# Altium PCB 04-12307_Drone_ESC.PcbDoc (part 3 of 5)
Units mm, origin at the board's own origin, x right, y up, seen from the top; angles counter-clockwise.
Board outline 55 x 33 mm, 4 copper layers (LAYER 1 (Top), LAYER 2, LAYER 3, LAYER 4 (Bottom)), stack 1.504 mm thick; 174 components, 90 nets, 407 pads, 193 vias.
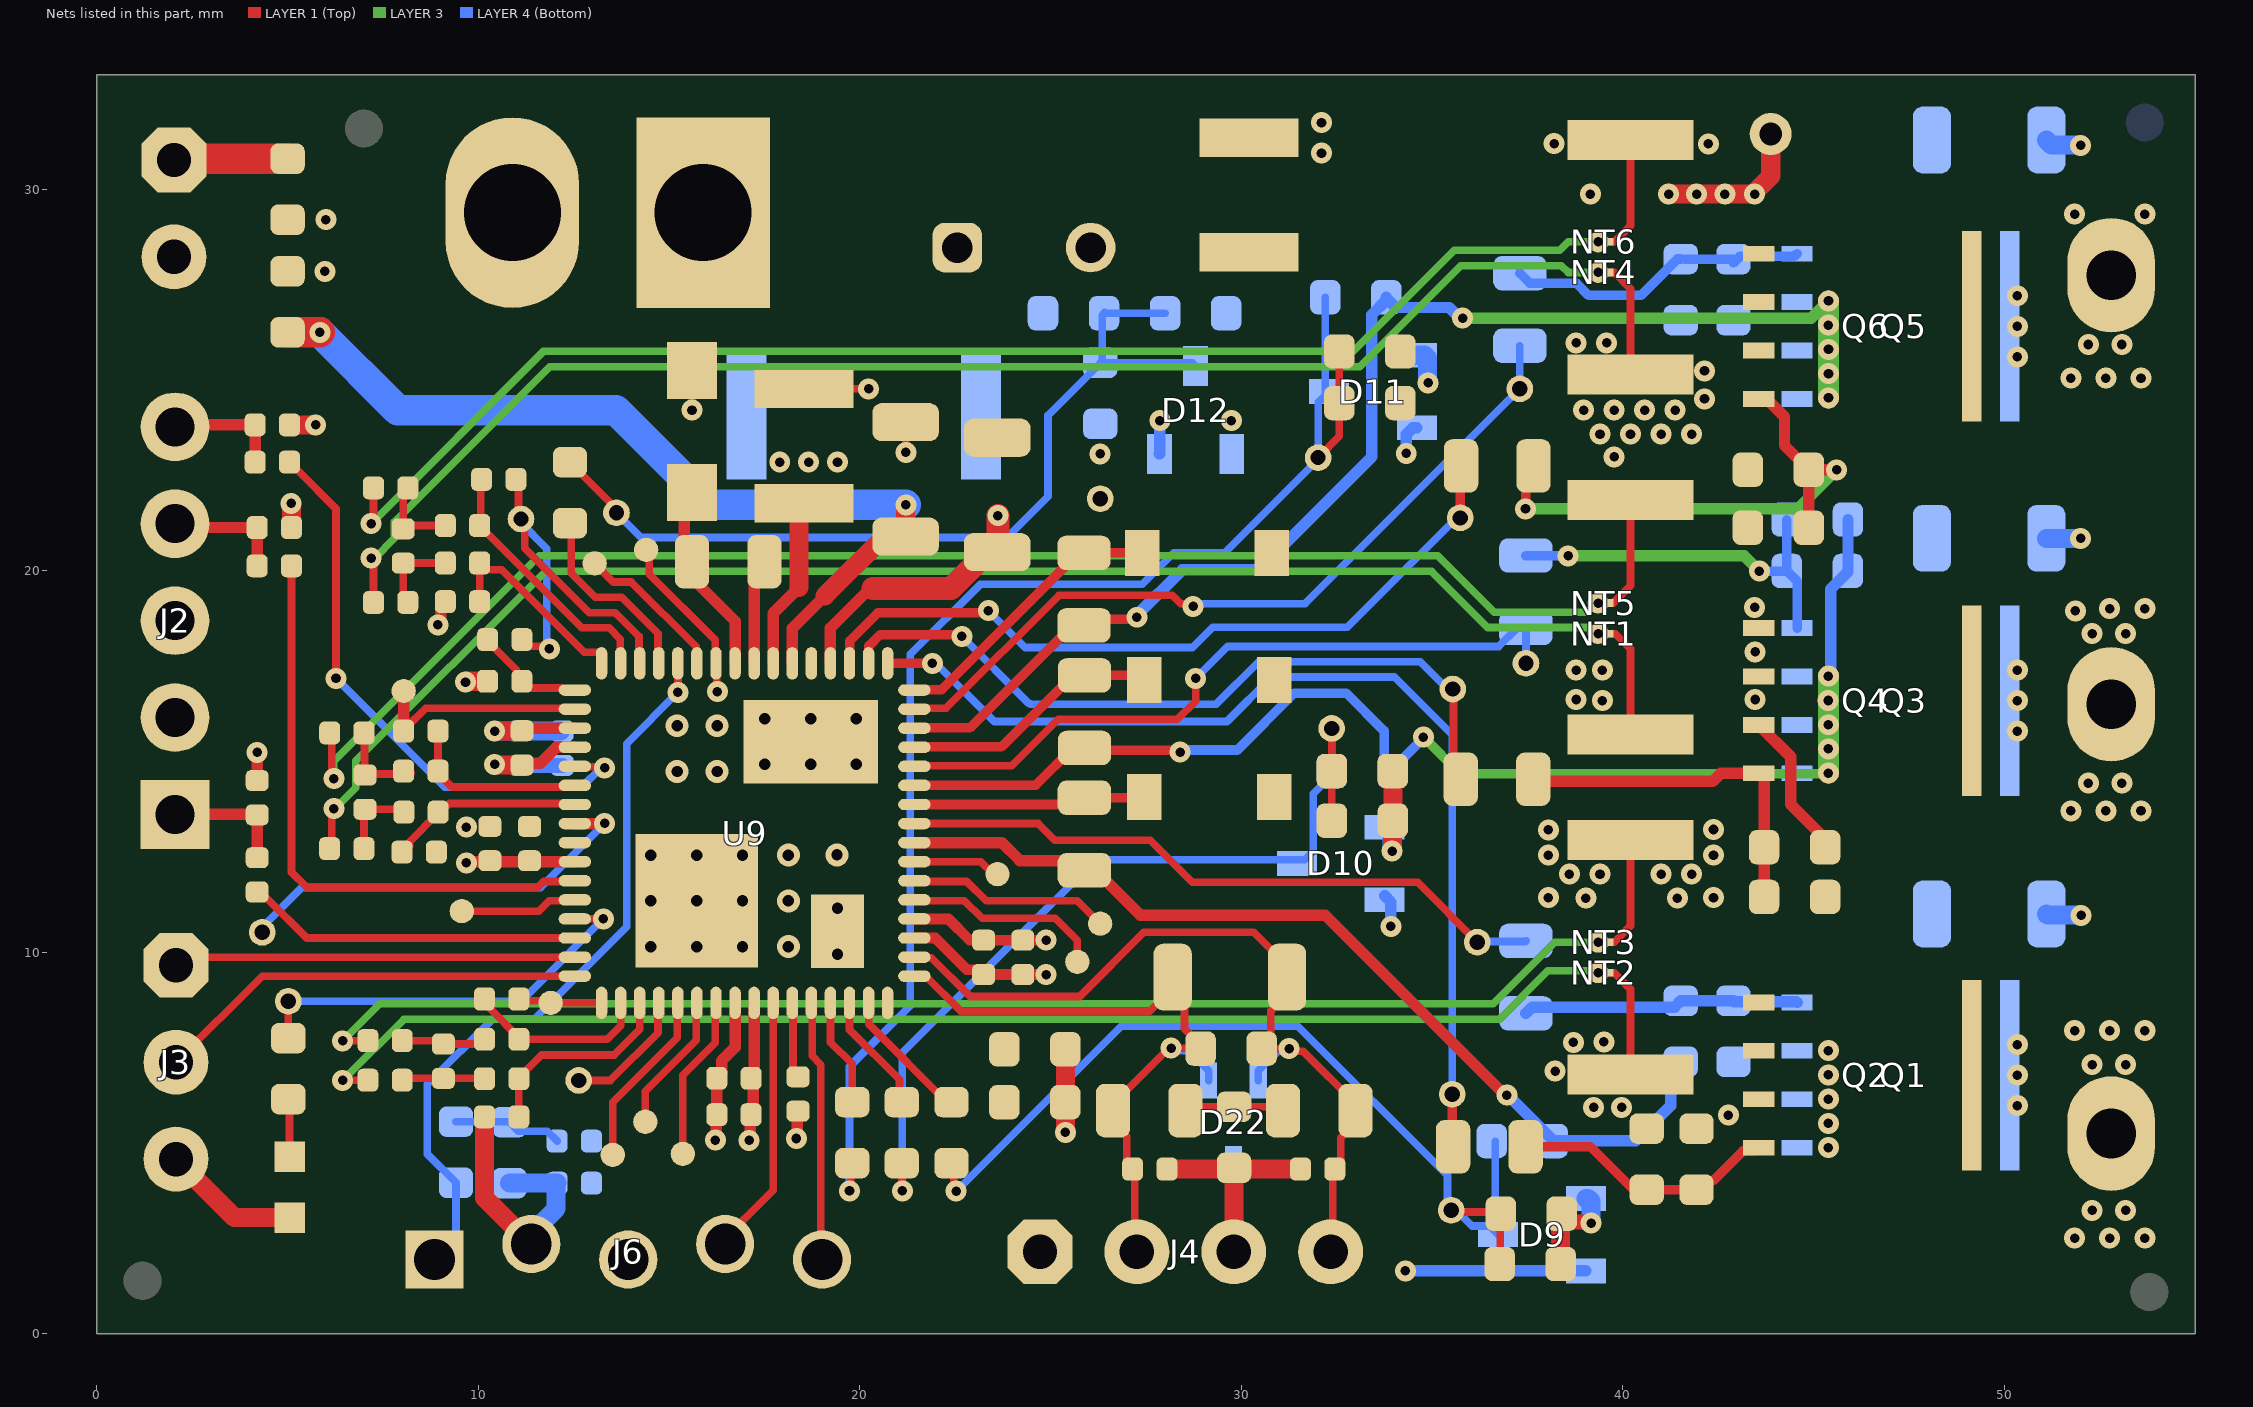
[diagram p4: the nets of this part, all layers, seen from the top]

## Part data (continued)
D24: library part DIODE1801, Forward Current=2A, Manufacturer 1="Nexperia USA Inc.", Manufacturer Part Number 1=PMEG6020ELRX, Operating Temperature="-55C to +175C", Package=SOD-123W, Reverse Current=150uA, Reverse Voltage=60V, Supplier Part Number 1=1727-2298-1-ND, Category=Diode, ComponentLink1Description="SVN Datasheet", ComponentLink1URL=https://chn-vm-apps.microchip.com/mchprepo/parts/Datasheets/PMEG6020ELR.pdf, ComponentLink2Description="Local Datasheet", ComponentLink2URL=C:\ALTIUM_WORK\00001_MCHP-CDB\Datasheets\PMEG6020ELR.pdf, ComponentLink3Description="Open Symbol", ComponentLink3URL="C:\ALTIUM_WORK\00001_MCHP-CDB\Library\LibraryRefs\Diode Schottky.SchLib", ComponentLink4Description="Open Footprint", ComponentLink4URL=C:\ALTIUM_WORK\00001_MCHP-CDB\Library\Footprints\SOD-123W.PcbLib, ComponentLink5Description="Open Footprint 2", ComponentLink6Description="Open Footprint 3", ComponentLink7Description="Open Footprint 4", Description_="DIO SCTKY PMEG6020ELRX 760mV 2A 60V SMD SOD-123W", Dev Tools Status=Design, MCHP-ID=DIODE1801, Owner="Narasimha Murthy", Populated=YES, Quantity Override=1, Reverse Recovery Time=<500ns, Revision=1, Status="MCL Design", Supplier 1=Digi-Key, Symbol="Diode Schottky", Type="Rectifier Single"
FD1 FD2 FD3 FD4 FD5 FD6: library part MECH0282, "Fiducial", Category=Hardware, ComponentLink1Description="SVN Datasheet", ComponentLink2Description="Local Datasheet", ComponentLink3Description="Open Symbol", ComponentLink3URL="C:\ALTIUM_WORK\00001_MCHP-CDB\Library\LibraryRefs\FIDUCIAL ROUND.SchLib", ComponentLink4Description="Open Footprint", ComponentLink4URL=C:\ALTIUM_WORK\00001_MCHP-CDB\Library\Footprints\Fiducial_1mm.PcbLib, ComponentLink5Description="Open Footprint 2", ComponentLink6Description="Open Footprint 3", ComponentLink7Description="Open Footprint 4", Description_="FIDUCIAL ROUND PCB 1mm SMD", Dev Tools Status=Production, MCHP-ID=MECH0282, Owner="Dragos Danaila", Populated=MECH, Quantity Override=1, Revision=1, Status="MCL Design", Symbol="FIDUCIAL ROUND", Type=Fiducial
HVDD: library part CON2734, "Test Point", Category=Connector, ComponentLink1Description="SVN Datasheet", ComponentLink2Description="Local Datasheet", ComponentLink3Description="Open Symbol", ComponentLink3URL="C:\ALTIUM_WORK\00001_MCHP-CDB\Library\LibraryRefs\Test Point No BOM.SchLib", ComponentLink4Description="Open Footprint", ComponentLink4URL=C:\ALTIUM_WORK\00001_MCHP-CDB\Library\Footprints\TP_1.1x0.6.PcbLib, ComponentLink5Description="Open Footprint 2", ComponentLink6Description="Open Footprint 3", ComponentLink7Description="Open Footprint 4", Description_="CON TP PAD PCB TH D1.1H0.6", Dev Tools Status=Design, MCHP-ID=CON2734, Owner="Severino Balong Jr.", Populated=DNP, Quantity Override=1, Restricted Sourcing=No, Revision=1, Status="MCL Design", Symbol="Test Point No BOM", Type="Test Point No BOM"
J1: library part CON2207, Current=15A, Manufacturer 1=AMASS, Manufacturer Part Number 1=XT30U-M, Voltage=500V, Category=Connector, ComponentLink1Description="SVN Datasheet", ComponentLink1URL="https://chn-vm-apps.microchip.com/mchprepo/parts/Datasheets/XT30U SPEC.pdf", ComponentLink2Description="Local Datasheet", ComponentLink2URL="C:\ALTIUM_WORK\00001_MCHP-CDB\Datasheets\XT30U SPEC.pdf", ComponentLink3Description="Open Symbol", ComponentLink3URL="C:\ALTIUM_WORK\00001_MCHP-CDB\Library\LibraryRefs\CON 1x2 POLARIZED.SchLib", ComponentLink4Description="Open Footprint", ComponentLink4URL="C:\ALTIUM_WORK\00001_MCHP-CDB\Library\Footprints\CON TERMINAL XT30U-M 5mm 1x2 Male 30A TH V.PcbLib", ComponentLink5Description="Open Footprint 2", ComponentLink6Description="Open Footprint 3", ComponentLink7Description="Open Footprint 4", Description_="CON POWER XT30U-M 5mm 1x2 Male 15A TH V", Dev Tools Status=Design, MCHP-ID=CON2207, Owner="Octavian Stroe", Populated=Yes, Quantity Override=1, Revision=1, Status="MCL Design", Supplier 1=TME, Supplier Part Number 1=XT30U-M, Symbol="CON 1x2 POLARIZED", Type=Power
J2: library part CON3098, Manufacturer 1=Samtec, Manufacturer Part Number 1=TSW-105-26-S-S, Operating Temperature="–55C to +125C", Supplier Part Number 1=612-TSW-105-26-S-S-ND, Assembly Type=TH, Category=Connector, ComponentLink1Description="SVN Datasheet", ComponentLink1URL=https://chn-vm-apps.microchip.com/mchprepo/parts/Datasheets/tsw_th.pdf, ComponentLink2Description="Local Datasheet", ComponentLink2URL=C:\ALTIUM_WORK\00001_MCHP-CDB\Datasheets\tsw_th.pdf, ComponentLink3Description="Open Symbol", ComponentLink3URL="C:\ALTIUM_WORK\00001_MCHP-CDB\Library\LibraryRefs\Header 1x5.SchLib", ComponentLink4Description="Open Footprint", ComponentLink4URL=C:\ALTIUM_WORK\00001_MCHP-CDB\Library\Footprints\HDR_M_2.54_1x5_MH5.84_IH2.54_TH3.2_TH_VERT.PcbLib, ComponentLink5Description="Open Footprint 2", ComponentLink6Description="Open Footprint 3", ComponentLink7Description="Open Footprint 4", Description_="CON HDR-2.54 Male 1x5 Gold 5.84MH 2.54IH 3.2TH TH VERT", Dev Tools Status=Design, MCHP-ID=CON3098, Owner="Deepak Kariyappa", Populated=YES, Quantity Override=1, Restricted Sourcing=No, Revision=1, Status="MCL Design", Supplier 1=Digi-Key, Symbol="Header 1x5", Type="Header 2.54mm"
J3: library part CON2895, Current=6.3A, Manufacturer 1=Samtec, Manufacturer Part Number 1=TSW-103-08-G-S, Operating Temperature="-55C to +125C", Supplier Part Number 1=SAM1038-03-ND, Voltage=550VAC, Assembly Type=TH, Category=Connector, ComponentLink1Description="SVN Datasheet", ComponentLink1URL=https://chn-vm-apps.microchip.com/mchprepo/parts/Datasheets/tsw_th.pdf, ComponentLink2Description="Local Datasheet", ComponentLink2URL=C:\ALTIUM_WORK\00001_MCHP-CDB\Datasheets\tsw_th.pdf, ComponentLink3Description="Open Symbol", ComponentLink3URL="C:\ALTIUM_WORK\00001_MCHP-CDB\Library\LibraryRefs\Header 1x3.SchLib", ComponentLink4Description="Open Footprint", ComponentLink4URL=C:\ALTIUM_WORK\00001_MCHP-CDB\Library\Footprints\HDR_M_2.54_1x3_TH_V_SAM_TSW-103-08-G-S.PcbLib, ComponentLink5Description="Open Footprint 2", ComponentLink6Description="Open Footprint 3", ComponentLink7Description="Open Footprint 4", Description_="CON HDR-2.54 Male 1x3 Gold 5.84MH  TH VERT", Dev Tools Status=Production, MCHP-ID=CON2895, Owner="Dragos Danaila", Populated=YES, Quantity Override=1, Restricted Sourcing=No, Revision=3, Status="MCL Design", Supplier 1=Digi-Key, Symbol="Header 1x3", Type="Header 2.54mm"
J4: library part CON0148, Manufacturer 1=Samtec, Manufacturer 2="Würth Elektronik", Manufacturer 3="SHENZHEN JUNHAO ENGINEERING", Manufacturer Part Number 1=TSW-104-07-G-S, Manufacturer Part Number 2=61300411121, Manufacturer Part Number 3=211-0411-0021-401, Supplier Part Number 1=SAM1029-04-ND, Category=Connector, ComponentLink1Description="SVN Datasheet", ComponentLink1URL=https://chn-vm-apps.microchip.com/mchprepo/parts/Datasheets/TSW-XXX-XX-XXX-X-XX-XXX-MKT.pdf, ComponentLink2Description="Local Datasheet", ComponentLink2URL=C:\ALTIUM_WORK\00001_MCHP-CDB\Datasheets\TSW-XXX-XX-XXX-X-XX-XXX-MKT.pdf, ComponentLink3Description="Open Symbol", ComponentLink3URL="C:\ALTIUM_WORK\00001_MCHP-CDB\Library\LibraryRefs\Header 1x4.SchLib", ComponentLink4Description="Open Footprint", ComponentLink4URL=C:\ALTIUM_WORK\00001_MCHP-CDB\Library\Footprints\HDR_M_2.54_1x4.PcbLib, ComponentLink5Description="Open Footprint 2", ComponentLink6Description="Open Footprint 3", ComponentLink7Description="Open Footprint 4", Description_="CON HDR-2.54 Male 1x4 Gold 5.84MH TH VERT", Dev Tools Status=Production, MCHP-ID=CON0148, Populated=Yes, Quantity Override=1, Restricted Sourcing=No, Revision=4, Status="MCL Design", Supplier 1=Digi-Key, Supplier 2=Digi-Key, Supplier 3="SHENZHEN JUNHAO ENGINEERING", Supplier Part Number 2=732-5317-ND, Supplier Part Number 3=211-0411-0021-401, Symbol="Header 1x4", Type="Header 2.54mm"
J5: library part CON2887, Current=6.3A, Manufacturer 1="Samtec Inc.", Manufacturer Part Number 1=TSW-102-08-G-S, Operating Temperature="-55C to +155C", Supplier Part Number 1=SAM1038-02-ND, Voltage=550VAC, Assembly Type=TH, Category=Connector, ComponentLink1Description="SVN Datasheet", ComponentLink1URL=https://chn-vm-apps.microchip.com/mchprepo/parts/Datasheets/https://suddendocs.samtec.com/prints/tsw-xxx-xx-x-x-xx-xxx-footprint.pdf, ComponentLink2Description="Local Datasheet", ComponentLink2URL=C:\ALTIUM_WORK\00001_MCHP-CDB\Datasheets\https://suddendocs.samtec.com/prints/tsw-xxx-xx-x-x-xx-xxx-footprint.pdf, ComponentLink3Description="Open Symbol", ComponentLink3URL="C:\ALTIUM_WORK\00001_MCHP-CDB\Library\LibraryRefs\Header 1x2.SchLib", ComponentLink4Description="Open Footprint", ComponentLink4URL=C:\ALTIUM_WORK\00001_MCHP-CDB\Library\Footprints\HDR_M_2.54_1x2_TH_V_SAM_TSW-102-08-G-S.PcbLib, ComponentLink5Description="Open Footprint 2", ComponentLink6Description="Open Footprint 3", ComponentLink7Description="Open Footprint 4", Description_="CON HDR-2.54 Male 1x2 Gold 5.84MH TH VERT", Dev Tools Status=Design, MCHP-ID=CON2887, Owner="Dragos Danaila", Populated=YES, Quantity Override=1, Restricted Sourcing=No, Revision=1, Status="MCL Design", Supplier 1=Digi-Key, Symbol="Header 1x2", Type="Header 2.54mm"
J6: library part CON3170, Current=3A, Manufacturer 1="Sullins Connector Solutions", Manufacturer Part Number 1=PRPC005SGAN-M71RC, Operating Temperature="-40C to +105C", Supplier Part Number 1=S1311EC-05-ND, Assembly Type=TH, Category=Connector, ComponentLink1Description="SVN Datasheet", ComponentLink1URL="https://chn-vm-apps.microchip.com/mchprepo/parts/Datasheets/x RxCxxxSxxN-M71RC_ 11637-B.pdf", ComponentLink2Description="Local Datasheet", ComponentLink2URL="C:\ALTIUM_WORK\00001_MCHP-CDB\Datasheets\x RxCxxxSxxN-M71RC_ 11637-B.pdf", ComponentLink3Description="Open Symbol", ComponentLink3URL="C:\ALTIUM_WORK\00001_MCHP-CDB\Library\LibraryRefs\Header 1x5.SchLib", ComponentLink4Description="Open Footprint", ComponentLink4URL=C:\ALTIUM_WORK\00001_MCHP-CDB\Library\Footprints\HDR_M_2.54_1x5_STAGGERED.PcbLib, ComponentLink5Description="Open Footprint 2", ComponentLink6Description="Open Footprint 3", ComponentLink7Description="Open Footprint 4", Description_="CON HDR-2.54 Male 1x5 8.08MH TH R/A DNP", Dev Tools Status=Design, MCHP-ID=CON3170, Owner="Severino Balong Jr.", Populated=DNP, Quantity Override=1, Restricted Sourcing=No, Revision=1, Status="MCL Design", Supplier 1=Digi-Key, Symbol="Header 1x5", Type="Header 2.54mm"
LABEL1: Manufacturer 1="ACT Logimark AS", Manufacturer 2="Sunrise Paper (M) Sdn Bhd", Manufacturer 3=Raynen, Manufacturer Part Number 1=505462, Manufacturer Part Number 2=037268-5, Manufacturer Part Number 3=10010407, Category=MCHP-Manufacturing, ComponentLink1Description="SVN Datasheet", ComponentLink2Description="Local Datasheet", ComponentLink3Description="Open Symbol", ComponentLink3URL=C:\ALTIUM_WORK\00001_MCHP-CDB\Library\LibraryRefs\08-10015.SchLib, ComponentLink4Description="Open Footprint", ComponentLink4URL=C:\ALTIUM_WORK\00001_MCHP-CDB\Library\Footprints\08-10015.PcbLib, ComponentLink5Description="Open Footprint 2", ComponentLink6Description="Open Footprint 3", ComponentLink7Description="Open Footprint 4", Description_="LABEL PCBA 18x6mm Datamatrix Assy# / Rev / Serial / Date", Dev Tools Status=Production, MCHP-ID=08-10015, Owner="Mark Loper", Populated=MECH, Quantity Override=1, Revision=4, Status="MCL Design", Supplier 1="ACT Logimark AS", Supplier 2="Microchip Technology", Supplier 3=Raynen, Supplier Part Number 1=505462, Supplier Part Number 2=01000-004967, Supplier Part Number 3=10010407, Symbol=08-10015, Type="PCBA Label"
LD1: library part LED1102, "LED", Forward Current=20mA, Manufacturer 1="WURTH ELEKTRONIK", Manufacturer Part Number 1=150060YS75000, Operating Temperature="-40C to +85C", Power=72mW, Reverse Voltage=5V, Supplier Part Number 1=732-4981-1-ND, Category=Diode, ComponentLink1Description="SVN Datasheet", ComponentLink1URL=https://chn-vm-apps.microchip.com/mchprepo/parts/Datasheets/150060YS75000.pdf, ComponentLink2Description="Local Datasheet", ComponentLink2URL=C:\ALTIUM_WORK\00001_MCHP-CDB\Datasheets\150060YS75000.pdf, ComponentLink3Description="Open Symbol", ComponentLink3URL=C:\ALTIUM_WORK\00001_MCHP-CDB\Library\LibraryRefs\LED_yellow.SchLib, ComponentLink4Description="Open Footprint", ComponentLink4URL=C:\ALTIUM_WORK\00001_MCHP-CDB\Library\Footprints\LED_0603_Yellow.PcbLib, ComponentLink5Description="Open Footprint 2", ComponentLink6Description="Open Footprint 3", ComponentLink7Description="Open Footprint 4", Description_="DIO LED YELLOW 2V 20mA 120mcd Clear SMD 0603", Dev Tools Status=Design, MCHP-ID=LED1102, Owner="Narasimha Murthy", Populated=YES, Quantity Override=1, Revision=1, Status="MCL Design", Supplier 1=Digi-Key, Symbol=LED_yellow, Type="LED Single"
NT1 NT2 NT3 NT4 NT5 NT6: library part RES2817, Package=0.2mm, Category=Resistor, ComponentLink1Description="SVN Datasheet", ComponentLink2Description="Local Datasheet", ComponentLink3Description="Open Symbol", ComponentLink3URL="C:\ALTIUM_WORK\00001_MCHP-CDB\Library\LibraryRefs\Net Tie.SchLib", ComponentLink4Description="Open Footprint", ComponentLink4URL=C:\ALTIUM_WORK\00001_MCHP-CDB\Library\Footprints\NET_TIE_0.2mmx0.5mm.PcbLib, ComponentLink5Description="Open Footprint 2", ComponentLink6Description="Open Footprint 3", ComponentLink7Description="Open Footprint 4", Description_="RES Net Tie SMD Net Tie 0.2mm", Dev Tools Status=Design, MCHP-ID=RES2817, Owner="Cristina Salanti", Populated=DNP, Quantity Override=1, Restricted Sourcing=No, Revision=A, Status="MCL Design", Symbol="Net Tie", Type="RES SMD"
PAD1 PAD2 PAD3: library part MISC1024, Manufacturer 1=3M, Manufacturer Part Number 1=SJ61A1, Supplier Part Number 1=SJ5746-0-ND, Category=Hardware, ComponentLink1Description="SVN Datasheet", ComponentLink1URL=https://chn-vm-apps.microchip.com/mchprepo/parts/Datasheets/SJxxA1.pdf, ComponentLink2Description="Local Datasheet", ComponentLink2URL=C:\ALTIUM_WORK\00001_MCHP-CDB\Datasheets\SJxxA1.pdf, ComponentLink3Description="Open Symbol", ComponentLink3URL="C:\ALTIUM_WORK\00001_MCHP-CDB\Library\LibraryRefs\Rubber Pad Cylindrical.SchLib", ComponentLink4Description="Open Footprint", ComponentLink4URL=C:\ALTIUM_WORK\00001_MCHP-CDB\Library\Footprints\BUMP_3M_SJ61A1_CYLINDRICAL_BLACK_D7.9H5.08.PcbLib, ComponentLink5Description="Open Footprint 2", ComponentLink6Description="Open Footprint 3", ComponentLink7Description="Open Footprint 4", Description_="MECH HW RUBBER PAD CYLINDRICAL D7.9 H5.08 BLACK", Dev Tools Status=Production, MCHP-ID=MISC1024, Owner="Bogdan Popescu", Populated=MECH, Quantity Override=1, Revision=4, Status="MCL Design", Supplier 1=Digi-Key, Symbol="Rubber Pad Cylindrical", Type="Rubber Pad"
PHASE_A PHASE_B PHASE_C: library part CON2948, "Test Point", Assembly Type=TH, Category=Connector, ComponentLink1Description="SVN Datasheet", ComponentLink2Description="Local Datasheet", ComponentLink3Description="Open Symbol", ComponentLink3URL="C:\ALTIUM_WORK\00001_MCHP-CDB\Library\LibraryRefs\Test Point No Bom.SchLib", ComponentLink4Description="Open Footprint", ComponentLink4URL=C:\ALTIUM_WORK\00001_MCHP-CDB\Library\Footprints\TP_3.0X2.3X1.3HOLE.PcbLib, ComponentLink5Description="Open Footprint 2", ComponentLink6Description="Open Footprint 3", ComponentLink7Description="Open Footprint 4", Description_="CON TP PAD PCB TH 3.0x2.3mm PAD 1.3mm HOLE", Dev Tools Status=Design, MCHP-ID=CON2948, Owner="Severino Balong Jr.", Populated=DNP, Quantity Override=1, Restricted Sourcing=No, Revision=1, Status="MCL Design", Symbol="Test Point No Bom", Type="Test Point No BOM"
Q1 Q2 Q3 Q4 Q5 Q6: library part TRA1519, "Transistor MOS", Current=27.9A, Drain to Source Voltage=40V, Gate to Source Voltage=20V, Manufacturer 1=Vishay, Manufacturer Part Number 1=SIJA72ADP-T1-GE3, Operating Temperature="-55C to +150C", Package="PowerPAK SO-8L", Power=4.8W, Supplier Part Number 1=SIJA72ADP-T1-GE3CT-ND, Category=Transistor, ComponentLink1Description="SVN Datasheet", ComponentLink1URL=https://chn-vm-apps.microchip.com/mchprepo/parts/Datasheets/sija72adp.pdf, ComponentLink2Description="Local Datasheet", ComponentLink2URL=C:\ALTIUM_WORK\00001_MCHP-CDB\Datasheets\sija72adp.pdf, ComponentLink3Description="Open Symbol", ComponentLink3URL="C:\ALTIUM_WORK\00001_MCHP-CDB\Library\LibraryRefs\Transistor MOS-N SSSGD.SchLib", ComponentLink4Description="Open Footprint", ComponentLink4URL=C:\ALTIUM_WORK\00001_MCHP-CDB\Library\Footprints\PPAK_SO-8L.PcbLib, ComponentLink5Description="Open Footprint 2", ComponentLink6Description="Open Footprint 3", ComponentLink7Description="Open Footprint 4", Description_="TRANS FET N-CH SIJA72ADP-T1-GE3 40V 27.9A 4.8W PowerPAK SO-8L AEC-Q101", Dev Tools Status=Production, MCHP-ID=TRA1519, Owner="Cristina Salanti", Populated=YES, Quantity Override=1, Restricted Sourcing=No, Revision=2, Status="MCL Design", Supplier 1=Digi-Key, Symbol="Transistor MOS-N SSSGD", Type=FET, Voltage=40V
R1 R11 R12: library part RES2903, Current=1A, Manufacturer 1=Yageo, Manufacturer Part Number 1=RC0402JR-070RP, Operating Temperature="-55C to +155C", Package=0402, Power=1/16W, Supplier Part Number 1=YAG1279TR-ND, Voltage=50V, Category=Resistor, ComponentLink1Description="SVN Datasheet", ComponentLink1URL=https://chn-vm-apps.microchip.com/mchprepo/parts/Datasheets/RC0402JR-070RP.pdf, ComponentLink2Description="Local Datasheet", ComponentLink2URL=C:\ALTIUM_WORK\00001_MCHP-CDB\Datasheets\RC0402JR-070RP.pdf, ComponentLink3Description="Open Symbol", ComponentLink3URL=C:\ALTIUM_WORK\00001_MCHP-CDB\Library\LibraryRefs\Resistor.SchLib, ComponentLink4Description="Open Footprint", ComponentLink4URL=C:\ALTIUM_WORK\00001_MCHP-CDB\Library\Footprints\RES_C_0402.PcbLib, ComponentLink5Description="Open Footprint 2", ComponentLink6Description="Open Footprint 3", ComponentLink7Description="Open Footprint 4", Composition=TKF, Description_="RES TKF 0R 1/16W SMD 0402", Dev Tools Status=Production, MCHP-ID=RES2903, Owner="Balaji Narayana", Populated=YES, Quantity Override=1, Revision=1, Status="MCL Design", Supplier 1=Digi-Key, Symbol=Resistor, Type="RES SMD"
R2: library part RES1023, Manufacturer 1=Panasonic, Manufacturer Part Number 1=ERJ-2RKF2201X, Operating Temperature="-55C to +155C", Package=0402, Power=1/10W, Supplier Part Number 1=P2.20KLTR-ND, Temperature Coefficient=100ppm/C, Tolerance=1%, Voltage=50V, Category=Resistor, ComponentLink1Description="SVN Datasheet", ComponentLink1URL=https://chn-vm-apps.microchip.com/mchprepo/parts/Datasheets/AOA0000CE2.pdf, ComponentLink2Description="Local Datasheet", ComponentLink2URL=C:\ALTIUM_WORK\00001_MCHP-CDB\Datasheets\AOA0000CE2.pdf, ComponentLink3Description="Open Symbol", ComponentLink3URL=C:\ALTIUM_WORK\00001_MCHP-CDB\Library\LibraryRefs\Resistor.SchLib, ComponentLink4Description="Open Footprint", ComponentLink4URL=C:\ALTIUM_WORK\00001_MCHP-CDB\Library\Footprints\RES_C_0402.PcbLib, ComponentLink5Description="Open Footprint 2", ComponentLink6Description="Open Footprint 3", ComponentLink7Description="Open Footprint 4", Composition=TKF, Description_="RES TKF 2.2k 1% 1/10W SMD 0402", Dev Tools Status=Production, MCHP-ID=RES1023, Owner="Tad Ahlvers", Populated=YES, Quantity Override=1, Revision=1, Status="MCL Design", Supplier 1=Digi-Key, Symbol=Resistor, Type="RES SMD"
R9: library part RES2467, Manufacturer 1="Vishay Dale", Manufacturer Part Number 1=CRCW25120000Z0EG, Operating Temperature="-55C to +155C", Package=2512, Power=1W, Supplier Part Number 1=541-0.0XCT-ND, Voltage=500V, Category=Resistor, ComponentLink1Description="SVN Datasheet", ComponentLink1URL=https://chn-vm-apps.microchip.com/mchprepo/parts/Datasheets/dcrcwe3.pdf, ComponentLink2Description="Local Datasheet", ComponentLink2URL=C:\ALTIUM_WORK\00001_MCHP-CDB\Datasheets\dcrcwe3.pdf, ComponentLink3Description="Open Symbol", ComponentLink3URL=C:\ALTIUM_WORK\00001_MCHP-CDB\Library\LibraryRefs\Resistor.SchLib, ComponentLink4Description="Open Footprint", ComponentLink4URL=C:\ALTIUM_WORK\00001_MCHP-CDB\Library\Footprints\RES_C_2512.PcbLib, ComponentLink5Description="Open Footprint 2", ComponentLink6Description="Open Footprint 3", ComponentLink7Description="Open Footprint 4", Composition=TKF, Description_="RES TKF 0R JUMPER 1W AEC-Q200 SMD 2512", Dev Tools Status=Design, MCHP-ID=RES2467, Owner="Narasimha Murthy", Populated=YES, Quantity Override=1, Revision=1, Status="MCL Design", Supplier 1=Digi-Key, Symbol=Resistor, Type="RES SMD"
R19: library part RSMT0001, Manufacturer 1=Panasonic, Manufacturer 2="Stackpole Electronics Inc", Manufacturer 3=Vishay, Manufacturer 4=Yageo, Manufacturer 5="KOA Speer", Manufacturer Part Number 1=ERJ-3GEY0R00V, Manufacturer Part Number 2=RMCF0603ZT0R00, Manufacturer Part Number 3=CRCW06030000Z0EA, Manufacturer Part Number 4=RC0603JR-070RL, Manufacturer Part Number 5=RK73Z1JTTP, Operating Temperature="-55C to +155C", Package=0603, Power=1/10W, Supplier Part Number 1=P0.0GTR-ND, Category=Resistor, ComponentLink1Description="SVN Datasheet", ComponentLink1URL=https://chn-vm-apps.microchip.com/mchprepo/parts/Datasheets/nrc.pdf, ComponentLink2Description="Local Datasheet", ComponentLink2URL=C:\ALTIUM_WORK\00001_MCHP-CDB\Datasheets\nrc.pdf, ComponentLink3Description="Open Symbol", ComponentLink3URL=C:\ALTIUM_WORK\00001_MCHP-CDB\Library\LibraryRefs\Resistor.SchLib, ComponentLink4Description="Open Footprint", ComponentLink4URL=C:\ALTIUM_WORK\00001_MCHP-CDB\Library\Footprints\RES_C_0603.PcbLib, ComponentLink5Description="Open Footprint 2", ComponentLink6Description="Open Footprint 3", ComponentLink7Description="Open Footprint 4", Composition=TKF, Description_="RES TKF 0R 1/10W SMD 0603", Dev Tools Status=Production, MCHP-ID=RSMT0001, Populated=DNP, Quantity Override=1, Revision=7, Status="MCL Design", Supplier 1=Digi-Key, Supplier 2=Digi-Key, Supplier 3=Digi-Key, Supplier 4=Digi-Key, Supplier 5=Digi-Key, Supplier 6=Mouser, Supplier Part Number 2=RMCF0603ZT0R00TR-ND, Supplier Part Number 3=RMCF0603ZT0R00CT-ND, Supplier Part Number 4=541-0.0GCT-ND, Supplier Part Number 5=311-0.0GRCT-ND, Supplier Part Number 6=660-RK73Z1JTTP, Symbol=Resistor, Type="RES SMD"
R21 R58 R67 R74 R83 R91: library part RSMT1213, Manufacturer 1="Stackpole Electronics Inc", Manufacturer 2=Yageo, Manufacturer 3=Vishay, Manufacturer Part Number 1=RMCF0402FT62R0, Manufacturer Part Number 2=AC0402FR-0762RL, Manufacturer Part Number 3=CRCW040262R0FKED, Operating Temperature="-55C to +155C", Package=0402, Power=1/16W, Supplier Part Number 1=RMCF0402FT62R0CT-ND, Temperature Coefficient=100ppm/C, Tolerance=1%, Voltage=50V, Category=Resistor, ComponentLink1Description="SVN Datasheet", ComponentLink1URL=https://chn-vm-apps.microchip.com/mchprepo/parts/Datasheets/dcrcwe3.pdf, ComponentLink2Description="Local Datasheet", ComponentLink2URL=C:\ALTIUM_WORK\00001_MCHP-CDB\Datasheets\dcrcwe3.pdf, ComponentLink3Description="Open Symbol", ComponentLink3URL=C:\ALTIUM_WORK\00001_MCHP-CDB\Library\LibraryRefs\Resistor.SchLib, ComponentLink4Description="Open Footprint", ComponentLink4URL=C:\ALTIUM_WORK\00001_MCHP-CDB\Library\Footprints\RES_C_0402.PcbLib, ComponentLink5Description="Open Footprint 2", ComponentLink6Description="Open Footprint 3", ComponentLink7Description="Open Footprint 4", Composition=TKF, Description_="RES TKF 62R 1% 1/16W SMD 0402 AEC-Q200", Dev Tools Status=Design, MCHP-ID=RSMT1213, Owner="Dragos Danaila", Populated=YES, Quantity Override=1, Restricted Sourcing=No, Revision=C, Status="MCL Design", Supplier 1=Digi-Key, Supplier 2=Digi-Key, Supplier 3=Digi-Key, Supplier Part Number 2=13-AC0402FR-0762RLCT-ND, Supplier Part Number 3=541-62.0LCT-ND, Symbol=Resistor, Type="RES SMD"
R22 R59 R68 R75 R84 R92: library part RES2221, Manufacturer 1=Yageo, Manufacturer Part Number 1=RT0402BRD07360RL, Operating Temperature="-55C to +155C", Package=0402, Power=1/10W, Supplier Part Number 1=YAG1413CT-ND, Temperature Coefficient=25ppm/C, Tolerance=0.1%, Voltage=50V, Category=Resistor, ComponentLink1Description="SVN Datasheet", ComponentLink1URL=https://chn-vm-apps.microchip.com/mchprepo/parts/Datasheets/PYu-RT_1-to-0.01_RoHS_L_9-1.pdf, ComponentLink2Description="Local Datasheet", ComponentLink2URL=C:\ALTIUM_WORK\00001_MCHP-CDB\Datasheets\PYu-RT_1-to-0.01_RoHS_L_9-1.pdf, ComponentLink3Description="Open Symbol", ComponentLink3URL=C:\ALTIUM_WORK\00001_MCHP-CDB\Library\LibraryRefs\Resistor.SchLib, ComponentLink4Description="Open Footprint", ComponentLink4URL=C:\ALTIUM_WORK\00001_MCHP-CDB\Library\Footprints\RES_C_0402.PcbLib, ComponentLink5Description="Open Footprint 2", ComponentLink6Description="Open Footprint 3", ComponentLink7Description="Open Footprint 4", Composition=TKF, Description_="RES TKF 360R 0.1% 0.1W SMD 0402", Dev Tools Status=Design, MCHP-ID=RES2221, Owner="Cristian Papuc", Populated=YES, Quantity Override=1, Restricted Sourcing=No, Revision=B, Status="MCL Design", Supplier 1=Digi-Key, Symbol=Resistor, Type="RES SMD"
R52 R69 R85: library part RES3368, Manufacturer 1=Panasonic, Manufacturer Part Number 1=ERJ-2RKF3401X, Operating Temperature="–55C to 155C", Package=0402, Power=1/10W, Supplier Part Number 1=P3.40KLTR-ND, Temperature Coefficient=100ppm/C, Tolerance=1%, Voltage=50V, Category=Resistor, ComponentLink1Description="SVN Datasheet", ComponentLink1URL=https://chn-vm-apps.microchip.com/mchprepo/parts/Datasheets/AOA0000C304.pdf, ComponentLink2Description="Local Datasheet", ComponentLink2URL=C:\ALTIUM_WORK\00001_MCHP-CDB\Datasheets\AOA0000C304.pdf, ComponentLink3Description="Open Symbol", ComponentLink3URL=C:\ALTIUM_WORK\00001_MCHP-CDB\Library\LibraryRefs\Resistor.SchLib, ComponentLink4Description="Open Footprint", ComponentLink4URL=C:\ALTIUM_WORK\00001_MCHP-CDB\Library\Footprints\RES_C_0402.PcbLib, ComponentLink5Description="Open Footprint 2", ComponentLink6Description="Open Footprint 3", ComponentLink7Description="Open Footprint 4", Composition=TKF, Description_="RES TKF 3.4k 1% 1/10W SMD 0402 AEC-Q200", Dev Tools Status=Design, MCHP-ID=RES3368, Owner="Deepak Kariyappa", Populated=Yes, Quantity Override=1, Restricted Sourcing=No, Revision=2, Status="MCL Design", Supplier 1=Digi-Key, Symbol=Resistor, Type="RES SMD"
R54: library part RSMT0001, "Resistor", Manufacturer 1=Panasonic, Manufacturer 2="Stackpole Electronics Inc", Manufacturer 3=Vishay, Manufacturer 4=Yageo, Manufacturer 5="KOA Speer", Manufacturer Part Number 1=ERJ-3GEY0R00V, Manufacturer Part Number 2=RMCF0603ZT0R00, Manufacturer Part Number 3=CRCW06030000Z0EA, Manufacturer Part Number 4=RC0603JR-070RL, Manufacturer Part Number 5=RK73Z1JTTP, Operating Temperature="-55C to +155C", Package=0603, Power=1/10W, Supplier Part Number 1=P0.0GTR-ND, Category=Resistor, ComponentLink1Description="SVN Datasheet", ComponentLink1URL=https://chn-vm-apps.microchip.com/mchprepo/parts/Datasheets/nrc.pdf, ComponentLink2Description="Local Datasheet", ComponentLink2URL=C:\ALTIUM_WORK\00001_MCHP-CDB\Datasheets\nrc.pdf, ComponentLink3Description="Open Symbol", ComponentLink3URL=C:\ALTIUM_WORK\00001_MCHP-CDB\Library\LibraryRefs\Resistor.SchLib, ComponentLink4Description="Open Footprint", ComponentLink4URL=C:\ALTIUM_WORK\00001_MCHP-CDB\Library\Footprints\RES_C_0603.PcbLib, ComponentLink5Description="Open Footprint 2", ComponentLink6Description="Open Footprint 3", ComponentLink7Description="Open Footprint 4", Composition=TKF, Description_="RES TKF 0R 1/10W SMD 0603", Dev Tools Status=Production, MCHP-ID=RSMT0001, Populated=Yes, Quantity Override=1, Revision=7, Status="MCL Design", Supplier 1=Digi-Key, Supplier 2=Digi-Key, Supplier 3=Digi-Key, Supplier 4=Digi-Key, Supplier 5=Digi-Key, Supplier 6=Mouser, Supplier Part Number 2=RMCF0603ZT0R00TR-ND, Supplier Part Number 3=RMCF0603ZT0R00CT-ND, Supplier Part Number 4=541-0.0GCT-ND, Supplier Part Number 5=311-0.0GRCT-ND, Supplier Part Number 6=660-RK73Z1JTTP, Symbol=Resistor, Type="RES SMD"
R60 R76 R93: library part RES3451, Manufacturer 1=Panasonic, Manufacturer 2=Yageo, Manufacturer Part Number 1=ERA-2AEB752X, Manufacturer Part Number 2=RP0402BRD077K5L, Operating Temperature="-55C to +155C", Package=0402, Power=1/16W, Supplier Part Number 1=P7.5KDCCT-ND, Temperature Coefficient=25ppm/C, Tolerance=0.1%, Category=Resistor, ComponentLink1Description="SVN Datasheet", ComponentLink1URL=https://chn-vm-apps.microchip.com/mchprepo/parts/Datasheets/AOA0000C307.pdf, ComponentLink2Description="Local Datasheet", ComponentLink2URL=C:\ALTIUM_WORK\00001_MCHP-CDB\Datasheets\AOA0000C307.pdf, ComponentLink3Description="Open Symbol", ComponentLink3URL=C:\ALTIUM_WORK\00001_MCHP-CDB\Library\LibraryRefs\Resistor.SchLib, ComponentLink4Description="Open Footprint", ComponentLink4URL=C:\ALTIUM_WORK\00001_MCHP-CDB\Library\Footprints\RES_C_0402.PcbLib, ComponentLink5Description="Open Footprint 2", ComponentLink6Description="Open Footprint 3", ComponentLink7Description="Open Footprint 4", Composition=TF, Description_="RES TF 7.5k 0.1% 1/16W SMD 0402 AEC-Q200", Dev Tools Status=Production, MCHP-ID=RES3451, Owner="Narasimha Murthy", Populated=YES, Quantity Override=1, Restricted Sourcing=No, Revision=1, Status="MCL Design", Supplier 1=Digi-Key, Supplier 2=Digi-Key, Supplier Part Number 2=13-RP0402BRD077K5LCT-ND, Symbol=Resistor, Type="RES SMD"
R99 R100: library part RES3404, Manufacturer 1=Vishay, Manufacturer Part Number 1=RCS080560R4FKEA, Operating Temperature="-55C to +155C", Package=0805, Power=1/2W, Supplier Part Number 1=541-RCS080560R4FKEATR-ND, Temperature Coefficient=100ppm/C, Tolerance=1%, Category=Resistor, ComponentLink1Description="SVN Datasheet", ComponentLink2Description="Local Datasheet", ComponentLink3Description="Open Symbol", ComponentLink3URL=C:\ALTIUM_WORK\00001_MCHP-CDB\Library\LibraryRefs\Resistor.SchLib, ComponentLink4Description="Open Footprint", ComponentLink4URL=C:\ALTIUM_WORK\00001_MCHP-CDB\Library\Footprints\RES_C_0805.PcbLib, ComponentLink5Description="Open Footprint 2", ComponentLink6Description="Open Footprint 3", ComponentLink7Description="Open Footprint 4", Composition=TKF, Description_="RES TKF 60.4R 1% 1/2W SMD 0805 AEC-Q200", Dev Tools Status=Design, MCHP-ID=RES3404, Owner="Severino Balong Jr.", Populated=YES, Quantity Override=1, Restricted Sourcing=No, Revision=2, Status="MCL Design", Supplier 1=Digi-Key, Symbol=Resistor, Type="RES SMD"
R103: library part RSMT1360, Manufacturer 1="TE Connectivity Passive Product", Manufacturer Part Number 1=RQ73C2B60R4BTD, Operating Temperature="-55C to +155C", Package=1206, Power=0.4W, Supplier Part Number 1=A140655CT-ND, Temperature Coefficient=10ppm/C, Tolerance=0.1%, Voltage=200V, Category=Resistor, ComponentLink1Description="SVN Datasheet", ComponentLink1URL=https://chn-vm-apps.microchip.com/mchprepo/parts/Datasheets/PYu-RC_Group_51_RoHS_L_11.pdf, ComponentLink2Description="Local Datasheet", ComponentLink2URL=C:\ALTIUM_WORK\00001_MCHP-CDB\Datasheets\PYu-RC_Group_51_RoHS_L_11.pdf, ComponentLink3Description="Open Symbol", ComponentLink3URL=C:\ALTIUM_WORK\00001_MCHP-CDB\Library\LibraryRefs\Resistor.SchLib, ComponentLink4Description="Open Footprint", ComponentLink4URL=C:\ALTIUM_WORK\00001_MCHP-CDB\Library\Footprints\RES_C_1206.PcbLib, ComponentLink5Description="Open Footprint 2", ComponentLink6Description="Open Footprint 3", ComponentLink7Description="Open Footprint 4", Composition=TF, Description_="RES TF 60.4R 0.1% 0.4W SMD 1206 AEC-Q200", Dev Tools Status=Design, MCHP-ID=RSMT1360, Owner="Narasimha Murthy", Populated=Yes, Quantity Override=1, Revision=1, Status="MCL Design", Supplier 1=Digi-Key, Symbol=Resistor, Type="RES SMD"
R110 R111 R112 R128: library part RES1126, Manufacturer 1=Panasonic, Manufacturer Part Number 1=ERJ-3EKF1802V, Operating Temperature="-55C to +155C", Package=0603, Power=1/10W, Supplier Part Number 1=P18.0KHCT-ND, Temperature Coeffcient=100ppm/C, Tolerance=1%, Voltage=75V, Category=Resistor, ComponentLink1Description=Datasheet, ComponentLink1URL=https://chn-vm-apps.microchip.com/mchprepo/parts/Datasheets/AOA0000CE2.pdf, Composition=TKF, Description_="RES TKF 18k 1% 1/10W SMD 0603", MCHP-ID=RES1126, Owner="Bogdan P (M91398)", Populated=Yes, Quantity Override=1, Revision=0, Status=Production, Supplier 1=Digi-Key, Type="RES SMD"
R114 R115 R118 R133: library part RSMT0324, Manufacturer 1=Panasonic, Manufacturer 2="Stackpole Electronics Inc", Manufacturer 3=Yageo, Manufacturer Part Number 1=ERJ-3EKF1000V, Manufacturer Part Number 2="RMCF 1/16 100 1% R", Manufacturer Part Number 3=RC0603FR-07100RL, Operating Temperature="-55C to +155C", Package=0603, Power=1/10W, Supplier Part Number 1=P100HCT-ND, Temperature Coeffcient=100ppm/C, Tolerance=1%, Voltage=75V, Category=Resistor, ComponentLink1Description="SVN Datasheet", ComponentLink1URL=https://chn-vm-apps.microchip.com/mchprepo/parts/Datasheets/AOA0000CE2.pdf, ComponentLink2Description="Local Datasheet", ComponentLink2URL=C:\ALTIUM_WORK\00001_MCHP-CDB\Datasheets\AOA0000CE2.pdf, ComponentLink3Description="Open Symbol", ComponentLink3URL=C:\ALTIUM_WORK\00001_MCHP-CDB\Library\LibraryRefs\Resistor.SchLib, ComponentLink4Description="Open Footprint", ComponentLink4URL=C:\ALTIUM_WORK\00001_MCHP-CDB\Library\Footprints\RES_C_0603.PcbLib, ComponentLink5Description="Open Footprint 2", ComponentLink6Description="Open Footprint 3", ComponentLink7Description="Open Footprint 4", Composition=TKF, Description_="RES TKF 100R 1% 1/10W SMD 0603", Dev Tools Status=Production, MCHP-ID=RSMT0324, Populated=Yes, Quantity Override=1, Revision=2, Status="MCL Design", Supplier 1=Digi-Key, Supplier 2=Digi-Key, Supplier 3=Digi-Key, Supplier Part Number 2=RMCF1/16100FRTR-ND, Supplier Part Number 3=311-100HRCT-ND, Symbol=Resistor, Type="RES SMD"
R119 R120 R121 R137: library part RES1110, Manufacturer 1=Panasonic, Manufacturer Part Number 1=ERJ-3EKF1801V, Operating Temperature="-55C to +155C", Package=0603, Power=1/10W, Supplier Part Number 1=P1.80KHCT-ND, Temperature Coeffcient=100ppm/C, Tolerance=1%, Voltage=75V, Category=Resistor, ComponentLink1Description=Datasheet, ComponentLink1URL=https://chn-vm-apps.microchip.com/mchprepo/parts/Datasheets/AOA0000CE2.pdf, Composition=TKF, Description_="RES TKF 1.8k 1% 1/10W SMD 0603", MCHP-ID=RES1110, Owner="Bogdan P (M91398)", Populated=Yes, Quantity Override=1, Revision=0, Status=Production, Supplier 1=Digi-Key, Type="RES SMD"
R153 R154 R156 R157 R158 R159: library part RES1168, Manufacturer 1=Panasonic, Manufacturer Part Number 1=ERJ-3EKF3323V, Operating Temperature="-55C to +155C", Package=0603, Power=1/10W, Supplier Part Number 1=P332KHCT-ND, Temperature Coeffcient=100ppm/C, Tolerance=1%, Voltage=75V, Category=Resistor, ComponentLink1Description=Datasheet, ComponentLink1URL=https://chn-vm-apps.microchip.com/mchprepo/parts/Datasheets/AOA0000CE2.pdf, Composition=TKF, Description_="RES TKF 332k 1% 1/10W SMD 0603", MCHP-ID=RES1168, Owner="Bogdan P (M91398)", Populated=Yes, Quantity Override=1, Revision=0, Status=Production, Supplier 1=Digi-Key, Type="RES SMD"
R160 R161 R167 R168 R171 R173: library part RES1422, Manufacturer 1=Yageo, Manufacturer Part Number 1=RC0805FR-0747RL, Operating Temperature="-55C to +155C", Package=0805, Power=1/8W, Supplier Part Number 1=311-47.0CRCT-ND, Temperature Coeffcient=100ppm/C, Tolerance=1%, Category=Resistor, ComponentLink1Description="SVN Datasheet", ComponentLink1URL=https://chn-vm-apps.microchip.com/mchprepo/parts/Datasheets/PYu-R_INT-thick_7.pdf, ComponentLink2Description="Local Datasheet", ComponentLink2URL=C:\ALTIUM_WORK\00001_MCHP-CDB\Datasheets\PYu-R_INT-thick_7.pdf, ComponentLink3Description="Open Symbol", ComponentLink3URL=C:\ALTIUM_WORK\00001_MCHP-CDB\Library\LibraryRefs\Resistor.SchLib, ComponentLink4Description="Open Footprint", ComponentLink4URL=C:\ALTIUM_WORK\00001_MCHP-CDB\Library\Footprints\RES_C_0805.PcbLib, ComponentLink5Description="Open Footprint 2", ComponentLink6Description="Open Footprint 3", ComponentLink7Description="Open Footprint 4", Composition=TKF, Description_="RES TKF 47R 1% 1/8W SMD 0805", Dev Tools Status=Production, MCHP-ID=RES1422, Owner="Henry de Villiers", Populated=YES, Quantity Override=1, Revision=1, Status="MCL Design", Supplier 1=Digi-Key, Symbol=Resistor, Type="RES SMD"
R181: library part RSMT0628, Manufacturer 1=Panasonic, Manufacturer Part Number 1=ERJ-3EKF4701V, Operating Temperature="-55C to +155C", Package=0603, Power=1/10W, Supplier Part Number 1=P4.70KHCT-ND, Temperature Coeffcient=100ppm/C, Tolerance=1%, Voltage=75V, Category=Resistor, ComponentLink1Description=Datasheet, ComponentLink1URL=https://chn-vm-apps.microchip.com/mchprepo/parts/Datasheets/AOA0000CE2.pdf, Composition=TKF, Description_="RES TKF 4.7k 1% 1/10W SMD 0603", MCHP-ID=RSMT0628, Populated=Yes, Quantity Override=1, Revision=1, Status=Production, Supplier 1=Digi-Key, Type="RES SMD"
R183: library part RSMT0518, Manufacturer 1=Yageo, Manufacturer 2=Panasonic, Manufacturer 3="Stackpole Electronics Inc", Manufacturer Part Number 1=RC0603FR-07470RL, Manufacturer Part Number 2=ERJ-3EKF4700V, Manufacturer Part Number 3=RMCF0603FT470R, Operating Temperature="-55C to +155C", Package=0603, Power=1/10W, Supplier Part Number 1=311-470HRCT-ND, Temperature Coeffcient=100ppm/C, Tolerance=1%, Voltage=50V, Category=Resistor, ComponentLink1Description=Datasheet, ComponentLink1URL=https://chn-vm-apps.microchip.com/mchprepo/parts/Datasheets/PYu-RC0603_51_RoHS_L_4.pdf, Composition=TKF, Description_="RES TKF 470R 1% 1/10W SMD 0603", MCHP-ID=RSMT0518, Populated=Yes, Quantity Override=1, Revision=1, Status=Production, Supplier 1=Digi-Key, Supplier 2=Digi-Key, Supplier 3=Digi-Key, Supplier Part Number 2=P470HCT-ND, Supplier Part Number 3=RMCF1/16470FRTR-ND, Type="RES SMD"
R187: library part RSMT0588, Manufacturer 1=Panasonic, Manufacturer Part Number 1=ERJ-3EKF6801V, Operating Temperature="-55C to +155C", Package=0603, Power=1/10W, Supplier Part Number 1=P6.80KHCT-ND, Temperature Coefficient=100ppm/C, Tolerance=1%, Voltage=75V, Category=Resistor, ComponentLink1Description="SVN Datasheet", ComponentLink1URL=https://chn-vm-apps.microchip.com/mchprepo/parts/Datasheets/AOA0000CE2.pdf, ComponentLink2Description="Local Datasheet", ComponentLink2URL=C:\ALTIUM_WORK\00001_MCHP-CDB\Datasheets\AOA0000CE2.pdf, ComponentLink3Description="Open Symbol", ComponentLink3URL=C:\ALTIUM_WORK\00001_MCHP-CDB\Library\LibraryRefs\Resistor.SchLib, ComponentLink4Description="Open Footprint", ComponentLink4URL=C:\ALTIUM_WORK\00001_MCHP-CDB\Library\Footprints\RES_C_0603.PcbLib, ComponentLink5Description="Open Footprint 2", ComponentLink6Description="Open Footprint 3", ComponentLink7Description="Open Footprint 4", Composition=TKF, Description_="RES TKF 6.8k 1% 1/10W SMD 0603", Dev Tools Status=Production, MCHP-ID=RSMT0588, Populated=Yes, Quantity Override=1, Revision=1, Status="MCL Design", Supplier 1=Digi-Key, Symbol=Resistor, Type="RES SMD"
Rsh1 Rsh2 Rsh3: library part RES2263, Manufacturer 1="Bourns Inc.", Manufacturer Part Number 1=CRA2512-FZ-R010ELF, Operating Temperature="-55°C ~ 170°C", Package=2512, Power=3W, Supplier Part Number 1=CRA2512-FZ-R010ELFCT-ND, Temperature Coeffcient=±50ppm/°C, Tolerance=±1%, Category=Resistor, ComponentLink1Description="SVN Datasheet", ComponentLink1URL=https://chn-vm-apps.microchip.com/mchprepo/parts/Datasheets/cra.pdf, ComponentLink2Description="Local Datasheet", ComponentLink2URL=C:\ALTIUM_WORK\00001_MCHP-CDB\Datasheets\cra.pdf, ComponentLink3Description="Open Symbol", ComponentLink3URL=C:\ALTIUM_WORK\00001_MCHP-CDB\Library\LibraryRefs\Resistor.SchLib, ComponentLink4Description="Open Footprint", ComponentLink4URL=C:\ALTIUM_WORK\00001_MCHP-CDB\Library\Footprints\RES_C_2512.PcbLib, ComponentLink5Description="Open Footprint 2", ComponentLink6Description="Open Footprint 3", ComponentLink7Description="Open Footprint 4", Composition=MF, Description_="RES MF 0.01R 1% 3W SMD 2512 AEC-Q200", Dev Tools Status=Design, MCHP-ID=RES2263, Owner="Narasimha Murthy", Populated=YES, Quantity Override=1, Revision=A, Status="MCL Design", Supplier 1=Digi-Key, Symbol=Resistor, Type="RES SMD"
U9: library part MIC9437, Manufacturer 1="Microchip Technology", Manufacturer Part Number 1=dsPIC33CDVC256MP506-E/M9, Operating Temperature="-40C to +125C", Category=MCHP-Microcontroller, ComponentLink1Description="SVN Datasheet", ComponentLink1URL=https://www.microchip.com/sitesearch/search/Product%20and%20Development%20Tools/dsPIC33CDVC256MP506-E/M9, ComponentLink2Description="Local Datasheet", ComponentLink3Description="Open Symbol", ComponentLink3URL=C:\ALTIUM_WORK\00001_MCHP-CDB\Library\LibraryRefs\dsPIC33CDVC256MP506_VGQFN-64.SchLib, ComponentLink4Description="Open Footprint", ComponentLink4URL=C:\ALTIUM_WORK\00001_MCHP-CDB\Library\Footprints\QFN-64_9X9_3EP_M9.PcbLib, ComponentLink5Description="Open Footprint 2", ComponentLink6Description="Open Footprint 3", ComponentLink7Description="Open Footprint 4", Description_="MCHP MCU 16-BIT 100MIPS 256kB 24kB dsPIC33CDVC256MP506-E/M9", Dev Tools Status=Design, MCHP-ID=MIC9437, Owner="Narasimha Murthy", Populated=YES, Quantity Override=1, Revision=1, Status="MCL Design", Supplier 1="Microchip Technology", Supplier Part Number 1=dsPIC33CDVC256MP506-E/M9, Symbol=dsPIC33CDVC256MP506_VGQFN-64, Type=16-Bit

## Via types
v1: diameter 0.55, hole 0.25, LAYER 1 (Top) to LAYER 4 (Bottom), tented both sides, 168 vias
v2: diameter 0.6, hole 0.3, LAYER 1 (Top) to LAYER 4 (Bottom), tented bottom, 25 vias

## Nets (pads, with @x,y where several pads share a name; then routed paths per layer and width w, separated by ;. In a path a pad name is that pad's centre, name@x,y a point inside that pad or via, vN(x,y) a via of type N, cw(c..) or ccw(c..) an arc to the next point about the centre after c; other vN are vias at no path point)
+3.3V_EXT: J5.1 R19.2 | length 3
  LAYER 1 (Top) w0.8: J5.1@2.024,30.769 2.059,30.804 R19.2@5,30.804
+5V: C123.1 C124.2 J4.1 U9.48
AD_PWM_IN1: R11.2 U9.30 | length 8.8
  LAYER 1 (Top) w0.2: R11.2@4.203,11.58 4.354,11.428 4.444,11.428 5.497,10.375 U9.30@12.528,10.375
AD_PWM_IN2: R12.2 U9.27 | length 15.7
  LAYER 1 (Top) w0.2: R12.2@5.102,20.131 5.102,12.095 5.497,11.7 11.562,11.7 11.718,11.856 12.509,11.856 U9.27@12.528,11.875
AUX1: AUX1.1 U9.28 | length 3.1
  LAYER 1 (Top) w0.2: AUX1.1@9.565,11.08 11.579,11.08 11.855,11.356 12.509,11.356 U9.28@12.528,11.375
AUX2: AUX2.1 U9.36 | length 3.4
  LAYER 1 (Top) w0.2: AUX2.1@12.629,6.642 13.456,6.642 14.709,7.895 14.709,8.656 U9.36@14.729,8.675
AUX3: AUX3.1 U9.37 | length 4.7
  LAYER 1 (Top) w0.2: AUX3.1@13.523,4.693 13.523,6.073 15.209,7.759 15.209,8.656 U9.37@15.229,8.675
dsPIC_DEBUG_RX: J3.2 U9.32 | length 11.4
  LAYER 1 (Top) w0.2: J3.2@2.074,7.119 4.331,9.377 12.527,9.377 U9.32@12.528,9.375
dsPIC_DEBUG_TX: J3.1 U9.31 | length 9.9
  LAYER 1 (Top) w0.2: J3.1@2.674,9.659 2.886,9.871 U9.31@12.524,9.871
dsPIC_PIN_43: C2.2 U9.43 | length 2.1
  LAYER 1 (Top) w0.2: U9.43@18.229,8.675 18.248,8.656 18.248,6.909 18.42,6.736 C2.2@18.479,6.736
dsPIC_PIN_49: C71.1 C121.1 D22.1 J4.2 R99.2 R103.1 U9.49 | length 18.4
  LAYER 1 (Top) w0.2: U9.49@21.429,9.375 21.731,9.375 22.664,8.442 27.585,8.442 28.2,9.056 R103.1@28.2,9.35 28.508,9.043 28.508,8.003 28.923,7.588 28.923,7.484 28.166,7.484 v1(28.159,7.491) 28.094,7.491 26.637,6.034 26.637,5.532 26.998,5.171 26.998,4.472 27.205,4.265 27.205,2.205 J4.2@27.26,2.15
  LAYER 4 (Bottom) w0.2: v1(28.159,7.491) 28.226,7.424 28.61,7.424 29.142,6.892 D22.1@29.142,6.642
dsPIC_PIN_50: C69.1 C121.2 D22.2 J4.4 R100.2 R103.2 U9.50 | length 22.1
  LAYER 1 (Top) w0.2: U9.50@21.429,9.875 21.448,9.856 21.873,9.856 22.888,8.842 25.762,8.842 27.445,10.525 30.319,10.525 31.2,9.644 31.2,8.894 30.768,8.462 30.768,7.715 C121.2@30.53,7.477 v1(31.253,7.477) ; v1@31.366,7.459 31.415,7.41 31.615,7.41 32.992,6.032 32.992,5.532 32.602,5.142 32.602,4.472 32.395,4.265 32.395,2.205 J4.4@32.34,2.15
  LAYER 4 (Bottom) w0.2: D22.2@30.442,6.642 30.442,6.892 30.96,7.41 31.186,7.41 v1(31.253,7.477)
GND: C1.2 C2.1 C3.2 C4.1 C5.1 C6.1 C15.1 C39.1 C48.2 C49.2 C50.1 C53.1 C54.1 C56.1 C57.1 C58.1 C60.1 C61.1 C62.1 C63.1 C69.2 C70.1 C71.2 C75.1 C76.1 C78.1 C85.1 C100.2 C102.2 C103.2 C118.1 C123.2 C124.1 D9.1 D10.1 D11.1 D12.1 D22.3 D24.1 J1.2 J2.3 J3.3 J4.3 J5.2 J6.3 LD1.2 NT6.2 R119.2 R120.2 R121.2 R137.2 Rsh3.1 U9.5 U9.20 U9.26 U9.40 U9.51 U9.65 U9.66 U9.67 | length 45.4
  LAYER 1 (Top) w0.2: J2.3@2.049,18.695 J2.3@2.056,18.688 ; v1(15.6,24.213) D24.1@15.6,25.25 ; C50.1@18.539,24.77 v1(20.229,24.77) ; C49.2@21.2,23.897 21.205,23.892 v1(21.205,23.106) ; NT6.2@39.65,28.621 39.771,28.621 40.2,29.05 Rsh3.1@40.2,31.296
  LAYER 1 (Top) w0.28: U9.51@21.429,10.375 21.976,10.375 22.809,9.542 23.119,9.542 C61.1@23.244,9.417 C60.1@24.269,9.417 ; C60.1@24.27,9.417 v1(24.881,9.417)
  LAYER 1 (Top) w0.3: C4.1@4.203,14.502 v1(4.203,15.24) ; v1(9.683,12.345) 9.711,12.373 10.276,12.373 C62.1@10.304,12.401 10.329,12.375 U9.26@12.528,12.375 ; C58.1@11.146,14.909 11.194,14.957 11.628,14.957 12.046,15.375 U9.20@12.528,15.375 ; v1(16.21,5.077) 16.23,5.097 16.23,5.774 16.25,5.794 16.25,6.75 16.3,6.8 16.325,6.8 16.375,6.85 16.375,7.157 16.729,7.511 U9.40@16.729,8.675 ; v1@18.358,5.14 C2.1@18.358,5.816
  LAYER 1 (Top) w0.4: R119.2@38.4,3.129 38.6,2.929 39.14,2.929 v1(39.169,2.9)
  LAYER 1 (Top) w0.5: J3.3@2.074,4.579 3.606,3.047 LD1.2@5.05,3.047 ; C6.1@5.05,23.826 5.73,23.826 v1(5.732,23.827) ; v1(5.09,21.766) 5.09,21.753 5.103,21.74 C5.1@5.103,21.135 ; v1(9.663,17.08) 9.677,17.08 9.702,17.105 C1.2@10.241,17.105 ; v1@10.443,14.909 C58.1@11.146,14.909 ; v1(25.385,5.278) 25.388,5.281 C124.1@25.388,6.069 C123.2@25.388,7.46 ; C71.2@28.05,4.32 C69.2@31.55,4.32 ; J4.3@29.8,2.15 29.81,2.16 C70.1@29.81,4.351 ; v1(33.954,12.652) 33.962,12.659 33.962,13.442 C78.1@33.969,13.45 R121.2@33.969,14.75 ; C75.1@38.369,1.831 38.369,3.119 R119.2@38.4,3.15
  LAYER 1 (Top) w1: Rsh3.1@40.2,31.296 Rsh3.1@40.211,31.285
  LAYER 4 (Bottom) w0.4: v1(10.426,14.925) 10.439,14.913 11.087,14.913 C57.1@11.1,14.9 C56.1@12.2,14.9
  LAYER 4 (Bottom) w0.5: v1(33.954,12.652) 33.944,12.661 33.944,13.289 D10.1@33.961,13.305 ; D11.1@34.6,25.65 34.8,25.65 34.875,25.575 34.875,24.958 34.894,24.939 v1(34.894,24.925) ; D9.1@39.031,3.55 39.084,3.55 39.159,3.475 39.159,2.91 v1(39.169,2.9) ; C103.2@51.1,11.004 51.127,10.977 52.001,10.977 v1(52.01,10.968) ; C102.2@51.1,20.852 v1(52,20.852) ; C100.2@51.1,31.292 51.232,31.16 51.99,31.16 v1(52,31.15)
  other v1: 18.338,5.119 26.3,23.063 29.739,23.937 42.239,31.192 38.2,31.196
  other v2: 19.413,9.955 14.524,10.15 15.724,10.15 16.923,10.15 18.129,10.15 19.413,11.155 14.524,11.35 15.724,11.35 16.923,11.35 18.129,11.35 14.524,12.55 15.724,12.55 16.923,12.55 18.129,12.55 19.4,12.555 15.208,14.739 16.259,14.739 17.508,14.925 18.708,14.925 19.908,14.925 15.208,15.939 16.259,15.939 17.508,16.125 18.708,16.125 19.908,16.125
HS_GATE_A: C106.2 Q1.4 R154.1 R161.2 | length 7.3
  LAYER 4 (Bottom) w0.3: R161.2@37.459,8.4 37.623,8.564 41.355,8.564 R154.1@41.519,8.728 C106.2@42.899,8.728 42.92,8.707 44.545,8.707 Q1.4@44.566,8.685
HS_GATE_B: C105.2 Q3.4 R156.1 R160.2 | length 10
  LAYER 3 w0.3: v1(38.566,20.391) 43.179,20.391 v1(43.58,19.99)
  LAYER 4 (Bottom) w0.25: R160.2@37.459,20.4 37.464,20.395 38.561,20.395 v1(38.566,20.391) ; v1(43.58,19.99) 43.584,19.994 44.296,19.994 C105.2@44.3,19.999 ; R156.1@44.3,21.343 C105.2@44.3,19.999 ; Q3.4@44.566,18.5 44.566,19.732 C105.2@44.3,19.999
HS_GATE_C: C107.2 Q5.4 R153.1 R171.2 | length 7.9
  LAYER 4 (Bottom) w0.25: R171.2@37.3,27.8 37.563,27.537 38.786,27.537 39.102,27.221 40.476,27.221 41.428,28.173 R153.1@41.519,28.173 ; R153.1@41.618,28.172 C107.2@42.898,28.172 ; C107.2@42.898,28.072 43.07,28.243 44.495,28.243 Q5.4@44.566,28.315
HVDD: C50.2 R9.2 U9.7 | length 4.5
  LAYER 1 (Top) w0.3: U9.7@17.729,17.575 17.729,18.888 18.408,19.568
  LAYER 1 (Top) w0.5: 18.408,19.568 18.408,21.639 C50.2@18.539,21.77
  other v1: 17.9,22.85 18.657,22.85 19.413,22.85
IA: IA.1 R69.2 U9.33 | length 2.2
  LAYER 1 (Top) w0.2: R69.2@11.059,8.777 11.11,8.726 11.925,8.726 11.975,8.675 U9.33@13.229,8.675
IB: IB.1 R85.2 U9.18 | length 5.7
  LAYER 1 (Top) w0.2: IB.1@8.043,16.85 IB.1@8.043,16.85 ; R85.2@8.075,15.879 8.101,15.879 8.622,16.4 12.202,16.4 12.226,16.375 U9.18@12.528,16.375
  LAYER 1 (Top) w0.3: R85.2@8.042,15.82 IB.1@8.043,16.85
IBUS: IBUS.1 R2.1 R52.2 U9.14 | length 11
  LAYER 1 (Top) w0.2: R52.2@10.984,22.397 11.051,22.331 11.051,21.325 11.213,21.163 11.213,20.594 12.902,18.905 13.592,18.905 14.209,18.288 14.209,17.594 U9.14@14.229,17.575 ; R2.1@11.141,18.198 11.141,18.194 11.314,18.021 11.793,18.021 v1(11.86,17.954)
  LAYER 4 (Bottom) w0.2: IBUS.1@11.118,21.258 11.793,20.583 11.793,18.021 v1(11.86,17.954)
LED: R187.1 TP17.1 U9.29 | length 10.8
  LAYER 1 (Top) w0.2: R187.1@5.019,7.75 TP17.1@5.019,8.65 ; U9.29@12.528,10.875 v1(13.28,10.875)
  LAYER 4 (Bottom) w0.2: TP17.1@5.019,8.717 11.121,8.717 v1(13.28,10.875)
LS_GATE_A: C110.2 Q2.4 R158.1 R168.2 | length 7.1
  LAYER 1 (Top) w0.25: R168.2@37.45,4.904 39.15,4.904 40.336,3.718 40.399,3.781 C110.2@41.931,3.781 42.159,4.009 42.359,4.009 43.145,4.795 43.484,4.795 Q2.4@43.564,4.875
LS_GATE_B: C108.2 Q4.4 R157.1 R167.2 | length 9.5
  LAYER 1 (Top) w0.3: R167.2@37.45,14.537 37.502,14.484 42.359,14.484 42.565,14.69 Q4.4@43.564,14.69 43.7,14.554 C108.2@43.7,12.753 R157.1@43.7,11.453
LS_GATE_C: C109.2 Q6.4 R159.1 R173.2 | length 14.4
  LAYER 1 (Top) w0.25: v1(37.448,21.623) 37.453,21.628 37.453,22.747 R173.2@37.45,22.75
  LAYER 1 (Top) w0.3: Q6.4@43.564,24.505 43.769,24.505 44.236,24.038 44.236,23.286 44.606,22.917 44.629,22.917 44.973,22.573 44.973,22.55 45.07,22.647 v1(45.6,22.647) ; R159.1@44.875,21.13 C109.2@44.875,22.502
  LAYER 3 w0.3: v1(37.448,21.623) 44.575,21.623 v1(45.6,22.647)
M\C\L\R\: J6.1 R183.2 U9.12 | length 19.5
  LAYER 1 (Top) w0.2: U9.12@15.229,17.575 15.231,17.572 v1(15.231,16.812)